# Altium PCB Audio module.PcbDoc
Units mil, origin at the board's own origin, x right, y up, seen from the top; angles counter-clockwise.
Board outline 1968.5 x 1968.5 mil, 2 copper layers (Top Layer, Bottom Layer); 34 components, 24 nets, 112 pads, 18 vias.
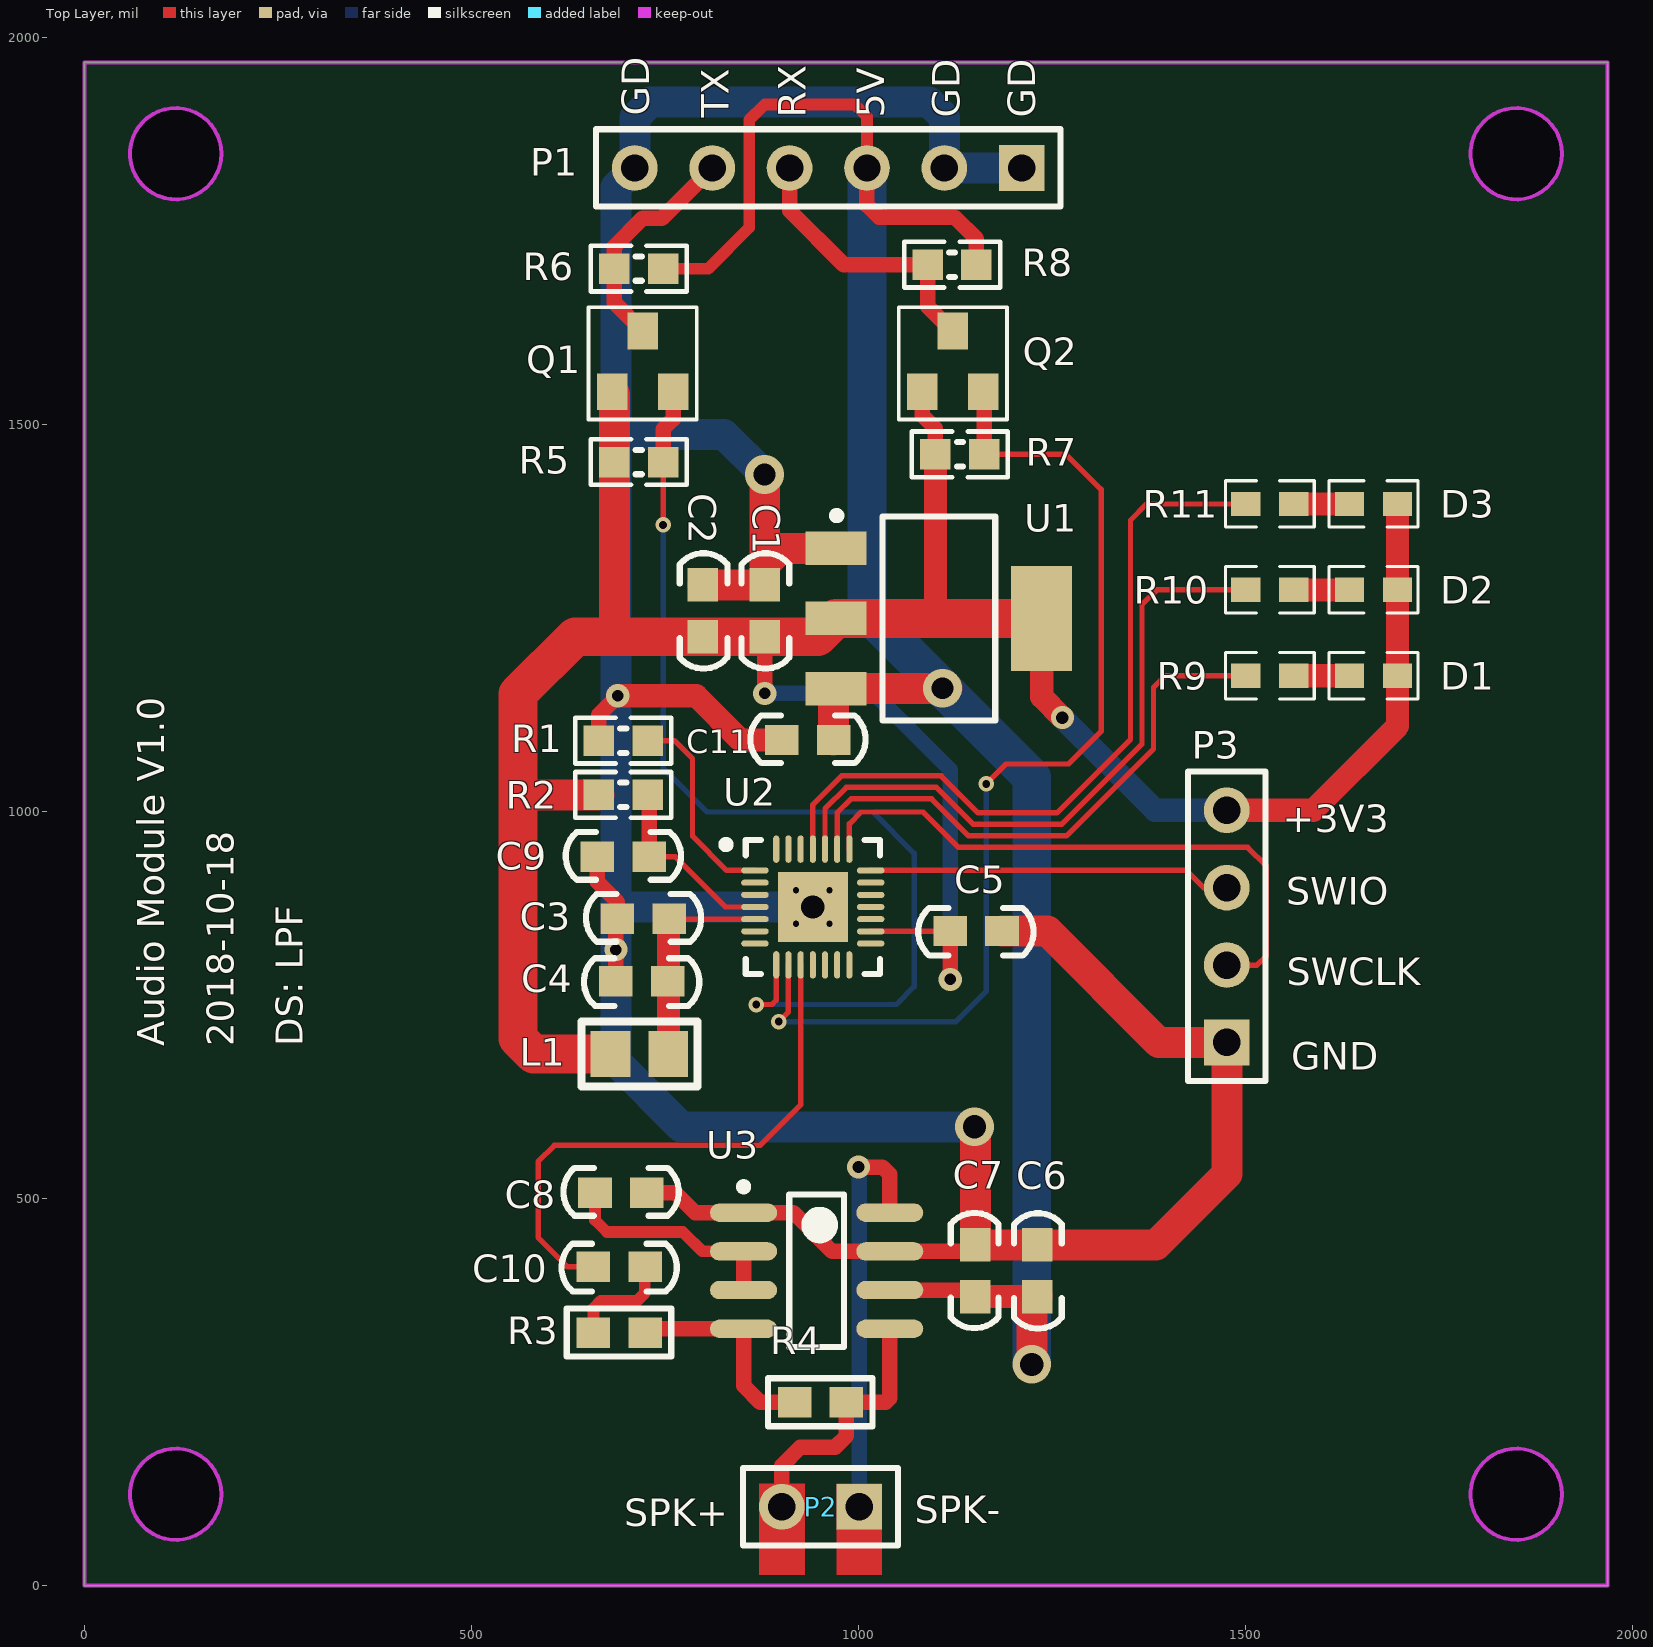
[diagram p0: Top Layer view]
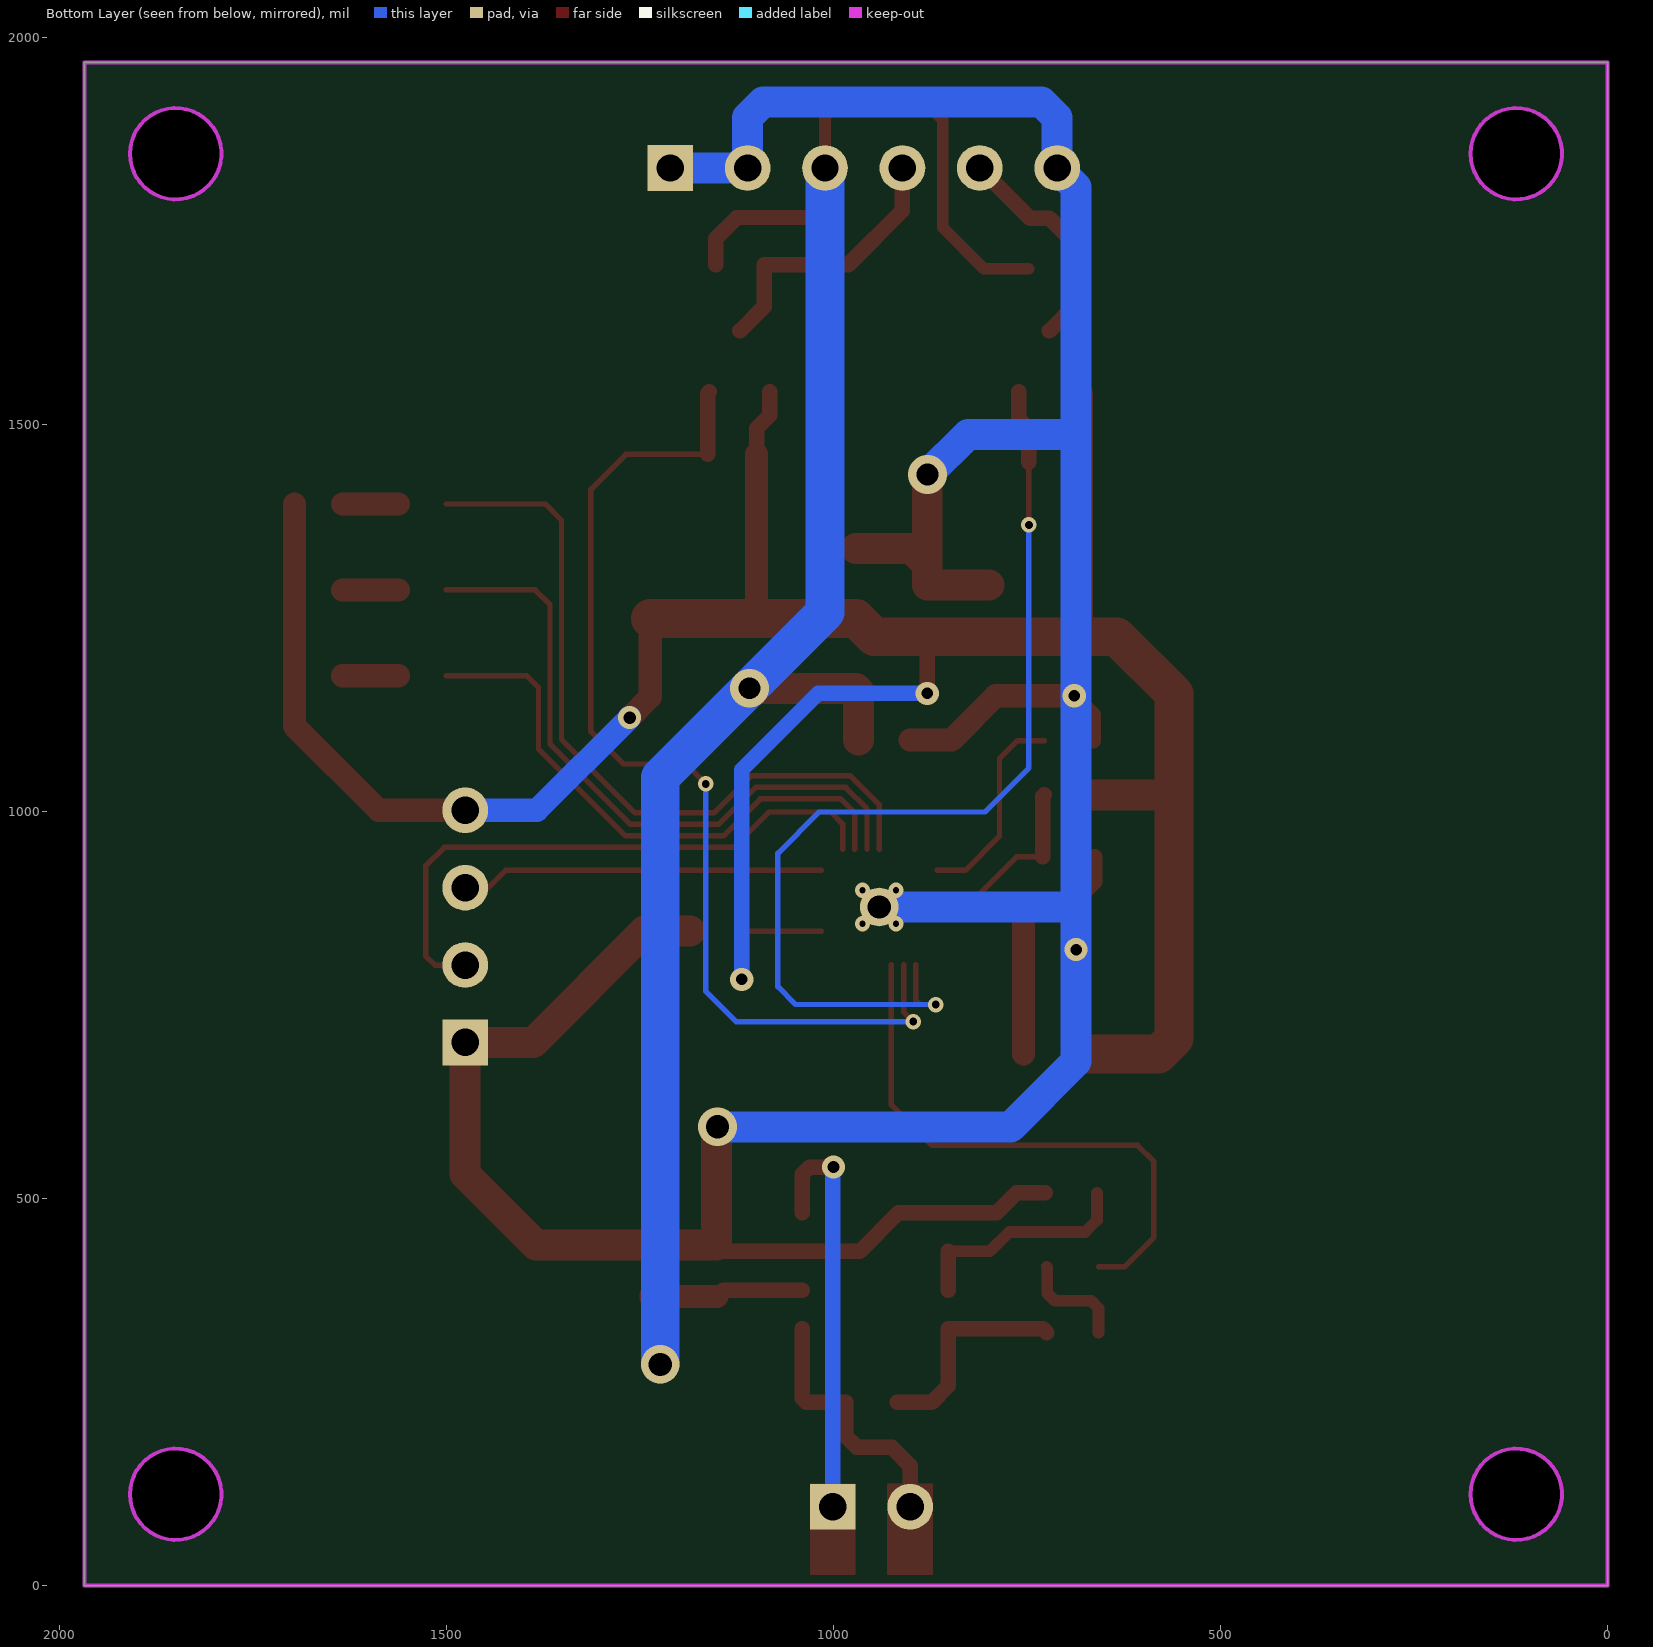
[diagram p1: Bottom Layer view, seen from below]

## Layer stack, top to bottom
Top Layer: signal copper 1.4
Dielectric: dielectric 12.6, FR-4, Dk 4.8
Bottom Layer: signal copper 1.4

## Board outline
0,0 1968.5,0 1968.5,1968.5 0,1968.5
cut-out: 118.11,1791.34 cw(c118.11,1850.39) 59.06,1850.39 cw(c118.11,1850.39) 118.11,1909.45 cw(c118.11,1850.39) 177.17,1850.39 cw(c118.11,1850.39)
cut-out: 1850.39,1791.34 cw(c1850.39,1850.39) 1791.34,1850.39 cw(c1850.39,1850.39) 1850.39,1909.45 cw(c1850.39,1850.39) 1909.45,1850.39 cw(c1850.39,1850.39)
cut-out: 1791.34,118.11 ccw(c1850.39,118.11) 1850.39,59.06 ccw(c1850.39,118.11) 1909.45,118.11 ccw(c1850.39,118.11) 1850.39,177.17 ccw(c1850.39,118.11)
cut-out: 118.11,59.06 cw(c118.11,118.11) 59.06,118.11 cw(c118.11,118.11) 118.11,177.17 cw(c118.11,118.11) 177.17,118.11 cw(c118.11,118.11)

## Design rules (kind name [scope] priority, off if disabled: settings)
Clearance [All] p1: gap=7.87
ComponentClearance [All] p1: gap=10 collisioncheckmode=3 verticalgap=5 showdistances=FALSE
PolygonConnect [All] p1: connectstyle=Relief reliefconductorwidth=10 reliefentries=4 polygonreliefangle="90 Angle"
RoutingVias [All] p1: holewidth=20 width=30 viastyle="Through Hole" minholewidth=5 minwidth=10 maxholewidth=100 maxwidth=200
SilkscreenOverComponentPads SilkToSolderMaskClearance [IsPad] p1: minsilkscreentomaskgap=10
SolderMaskExpansion [All] p1: expansion=4
Width [All] p1: maxlimit=100 minlimit=5 preferedwidth=20
26 further rules are at their usual default settings.

## Components (designator, comment, footprint, x,y, rotation, side; value= is the part's Value field where it differs from the comment)
C1 "Cap" 0603-2 879.24,1259.85 r270 top
C2 "Cap" 0603-2 799.24,1259.85 r270 top
C3 "Cap" 0603-2 722.37,861.98 r0 top
C4 "Cap" 0603-2 720.37,780.98 r180 top
C5 "Cap" 0603-2 1152.37,845.98 r180 top
C6 "Cap" 0603-2 1231.37,406.98 r270 top
C7 "Cap" 0603-2 1151.37,406.98 r90 top
C8 "Cap" 0603-2 693.37,507.98 r0 top
C9 "Cap" 0603-2 696.37,941.98 r0 top
C10 "Cap" 0603-2 691.37,411.98 r180 top
C11 "Cap" 0603-2 934.86,1092.78 r0 top
D1 "RED_LED" RES_0603 1665.86,1175.78 r180 top
D2 "YELLOW_LED" RES_0603 1665.86,1286.78 r180 top
D3 "BLUE_LED" RES_0603 1665.86,1397.78 r180 top
L1 "Inductor" 0805-1 717.37,686.98 r0 top
P1 "Header6" HDR6X1_A 1211.37,1831.98 r180 top
P2 "PZ-1*2" HDR2X1_A 1001.37,101.98 r180 top
P3 "PZ-1*4" HDR4X1_A 1476.37,701.98 r90 top
Q1 "AP2306" SOT-23 721.37,1581.98 r0 top
Q2 "AP2306" SOT-23 1122.37,1581.98 r0 top
R1 "10K" RES-0603 696.37,1091.98 r180 top
R2 "10K" RES-0603 696.37,1021.98 r180 top
R3 "Res1" 0603-1 691.37,326.98 r0 top
R4 "Res1" 0603-1 951.37,236.98 r0 top
R5 "10K" RES-0603 716.37,1451.98 r180 top
R6 "10K" RES-0603 716.37,1701.98 r0 top
R7 "10K" RES-0603 1131.37,1461.98 r180 top
R8 "10K" RES-0603 1121.37,1706.98 r0 top
R9 "RES" RES_0603 1531.86,1175.78 r0 top
R10 "RES" RES_0603 1531.86,1286.78 r0 top
R11 "RES" RES_0603 1531.86,1397.78 r0 top
U1 "AS1117-3.3" SOT-223 1104.24,1249.85 r270 top
U2 "GD32F150G4U6" QFN28-1 941.37,876.98 r0 top
U3 "E8002A" SOP-8 946.37,406.98 r0 top

## Footprints (in the part's own frame and the unit in brackets; to place one, negate y for a bottom-side part, rotate by r counter-clockwise, add the part's x,y. Pads: shape width x height; smd on the part's side, far side on the other; paste and mask are expansions set on the pad)
0603-1 [mm] "贴片带丝印"
  rect 1.1x1 smd: 1(-0.85,0) 2(0.85,0)
  silkscreen extent -1.73,-0.79 1.7,0.79, body extent -1.14,-0.38 1.14,0.38, height 1
0603-2 [mm] "贴片无丝印"
  rect 1.1x1 smd: 1(-0.85,0) 2(0.85,0)
  silkscreen extent -1.88,-0.76 1.9,0.81
0805-1 [mm] "贴片带丝印"
  rect 1.3x1.5 smd: 1(-0.95,0) 2(0.95,0)
  silkscreen extent -1.91,-1.07 1.91,1.07, body extent -1.14,-0.51 1.14,0.51, height 1
HDR2X1_A [mm] "Connector; Header; 2 Position"
  rect 1.5x1.5 hole 0.9: 1(0,0)
  round 1.5 hole 0.9: 2(2.54,0)
  silkscreen extent -1.27,-1.27 3.81,1.27
HDR4X1_A [mm] "Connector; Header; 4 Position"
  rect 1.5x1.5 hole 0.9: 1(0,0)
  round 1.5 hole 0.9: 2(2.54,0) 3(5.08,0) 4(7.62,0)
  silkscreen extent -1.27,-1.27 8.89,1.27
HDR6X1_A [mm] "Connector; Header; 4 Position"
  rect 1.5x1.5 hole 0.9: 1(0,0)
  round 1.5 hole 0.9: 2(2.54,0) 3(5.08,0) 4(7.62,0) 5(10.16,0) 6(12.7,0)
  silkscreen extent -1.27,-1.27 13.97,1.27
QFN28-1 [mm] "QFN, 28-Leads, Body 4.00x4.00mm, Pitch 0.40mm, Thermal Pad 2.30x2.30mm, IPC Medium Density"
  oval 0.9x0.2 smd: 1(-1.9,1.2) 2(-1.9,0.8) 3(-1.9,0.4) 4(-1.9,0) 5(-1.9,-0.4) 6(-1.9,-0.8) 7(-1.9,-1.2) 15(1.9,-1.2) 16(1.9,-0.8) 17(1.9,-0.4) 18(1.9,0) 19(1.9,0.4) 20(1.9,0.8) 21(1.9,1.2)
  oval 0.2x0.9 smd: 8(-1.2,-1.9) 9(-0.8,-1.9) 10(-0.4,-1.9) 11(0,-1.9) 12(0.4,-1.9) 13(0.8,-1.9) 14(1.2,-1.9) 22(1.2,1.9) 23(0.8,1.9) 24(0.4,1.9) 25(0,1.9) 26(-0.4,1.9) 27(-0.8,1.9) 28(-1.2,1.9)
  rect 2.3x2.3 smd: 29(0,0)
  silkscreen extent -2.97,-2.2 2.2,2.2, body extent -2.05,-2.05 2.05,2.05, height 0.8
RES-0603 [mm] "Chip Resistor, 2-Leads, Body 1.6x0.8mm, IPC Medium Density"
  rect 1x1 smd: 1(-0.8,0) 2(0.8,0)
  silkscreen extent -1.58,-0.75 1.57,0.75, body extent -0.88,-0.48 0.87,0.47, height 0.5
RES_0603 [mm]
  rect 0.96x0.8 smd: 1(-0.79,0) 2(0.79,0)
  silkscreen extent -1.46,-0.76 1.46,0.76, body extent -0.8,-0.41 0.8,0.39, height 0.38
SOP-8 [mm]
  oval 2.2x0.6 smd: 1(-2.4,1.905) 2(-2.4,0.635) 3(-2.4,-0.635) 4(-2.4,-1.905) 5(2.4,-1.905) 6(2.4,-0.635) 7(2.4,0.635) 8(2.4,1.905)
  silkscreen extent -2.52,-2.5 0.9,2.88, body extent -1.99,-2.5 1.99,2.5, height 1.75
SOT-23 [mm] "9014贴片封装"
  rect 1x1.2 smd: 1(-1,-1) 2(1,-1) 3(0,1)
  silkscreen extent -1.78,-1.91 1.78,1.78, body extent -1.5,-1.32 1.5,1.22, height 1.1
SOT-223 [mm]
  rect 1.1x2 smd: 1(-2.3,-3.375) 2(0,-3.375) 3(2.3,-3.375)
  rect 3.45x2 smd: 4(0,3.375)
  silkscreen extent -3.5,-3.48 3.35,1.85, body extent -3.3,-3.94 3.3,3.43, height 0.8

## Part data
C1 C2 C3 C4 C5 C6 C7 C8 C9 C10 C11: "无极性电容"
D1 D2 D3: library part LED
L1: "电感"
Q1 Q2: library part MOSFET-N1, "N-MOSFET1"
R1 R2 R5 R6 R7 R8: library part Res1, "贴片电阻"
R3 R4: "贴片电阻"
U1: library part AS1117, "AS1117"

## Free pads (board coordinates)
  round 50 hole 30: 0(941.37,876.98)

## Via types
v1: diameter 30, hole 15, Top Layer to Bottom Layer, 5 vias
v2: diameter 20, hole 10, Top Layer to Bottom Layer, 4 vias
v3: diameter 19.68, hole 7.87, Top Layer to Bottom Layer, 4 vias
v4: diameter 50, hole 28, Top Layer to Bottom Layer, 2 vias
v5: diameter 50, hole 30, Top Layer to Bottom Layer, 2 vias
v6: diameter 30, hole 16, Top Layer to Bottom Layer, 1 vias

## Nets (pads, with @x,y where several pads share a name; then routed paths per layer and width w, separated by ;. In a path a pad name is that pad's centre, name@x,y a point inside that pad or via, vN(x,y) a via of type N, cw(c..) or ccw(c..) an arc to the next point about the centre after c; other vN are vias at no path point)
+5V: C6.2 C7.1 C11.2 P1.3 R6.2 R8.2 U1.3 U3.6 | length 2876.7
  Top Layer w15: R6.2 806.37,1701.98 859.37,1754.98 859.37,1894.28 879.06,1913.98 995.37,1913.98 1011.37,1897.98 P1.3
  Top Layer w20: P1.3 1011.37,1783.98 1027.37,1767.98 1125.37,1767.98 1152.86,1740.48 R8.2 ; U3.6 1142.9,381.98 C7.1
  Top Layer w30: C7.1 C6.2
  Top Layer w40: C11.2 968.33,1156.26 U1.3 1114.38,1159.3 v4@1114.86,1159.78 ; v5(1224.37,285.98) 1224.37,366.51 C6.2
  Bottom Layer w50: P1.3 1011.37,1257.72 1224.37,1044.72 v5(1224.37,285.98)
  other v4: 1108.86,1159.78
A3V3: C3.2 C4.1 L1.2 U2.5 | length 285.9
  Top Layer w7: C3.2@754.77,860.91 755.08,861.23 U2.5
  Top Layer w30: L1.2 C3.2@754.77,860.91
BLUE_LED: R11.1 U2.25 | length 983.4
  Top Layer w7: U2.25 941.37,1009.35 978.54,1046.53 1107.18,1046.53 1155.11,998.6 1256.86,998.6 1351.86,1093.6 1351.86,1376.78 1372.86,1397.78 R11.1
D3V3: C1.2 C2.2 C5.2 D1.1 D2.1 D3.1 L1.1 P3.4 Q1.1 Q2.1 R2.2 R5.2 R7.2 U1.2 U1.4 U2.16 | length 3766.3
  Top Layer w7: U2.16 1118.41,845.48 C5.2
  Top Layer w20: Q1.1 Q1.1@684.87,1539.73 ; C1.2 879.24,1152.98 v1(879.37,1152.98) ; U1.2 U1.2@971.37,1257.72 ; Q2.1 1083,1512.35 1099.87,1495.47 R7.2 R7.2@1095.37,1457.47 ; v1(1118.9,783.44) C5.2
  Top Layer w30: 1099.87,1250.86 R7.2 ; U1.4 1237.11,1148.53 v6(1263.86,1121.78) ; P3.4 1588.06,1001.98 1696.96,1110.88 D1.1 D2.1 D3.1
  Top Layer w40: 563.37,1021.98 R2.2 ; 684.87,1226.39 R5.2 Q1.1@684.87,1539.73
  Top Layer w50: L1.1 580.66,686.98 560.37,707.28 560.37,1152.28 634.47,1226.39 C2.2 C1.2 947.9,1226.39 U1.2 U1.4
  Bottom Layer w20: v1(879.37,1152.98) 1020.37,1152.98 1031.61,1141.73 1118.9,1054.44 v1(1118.9,783.44)
  Bottom Layer w30: v6(1263.86,1121.78) 1383.66,1001.98 P3.4
DA: C10.2 U2.10 | length 735.8
  Top Layer w7: C10.2 624.37,411.98 586.37,449.98 586.37,547.98 607.37,568.98 873.37,568.98 925.62,621.23 U2.10
GND: C1.1 C2.1 C3.1 C4.2 C5.1 C6.1 C7.2 C8.2 C9.1 C11.1 P1.1 P1.2 P1.6 P3.1 pad.0 R1.2 U1.1 U2.29 U3.1 U3.7 | length 5080.5
  Top Layer w20: C9.1 662.9,909.44 688.9,883.44 C3.1 686.9,859.98 v1(686.9,821.98) C4.2 ; R1.2 664.87,1125.48 v1(689.37,1149.98) ; C8.2 763.37,507.98 789.37,481.98 U3.1 916.37,481.98 966.37,431.98 U3.7 1142.9,431.98 C7.2 ; C2.1@798.58,1293.98 C2.1 ; U1.1 U1.1@974.24,1343.28
  Top Layer w30: v1(689.37,1149.98) 790.66,1149.98 847.86,1092.78 C11.1
  Top Layer w40: C2.1 C1.1 879.24,1320.16 ; v4(878.86,1435.78) 879.24,1435.4 879.24,1320.16 ; U1.1 899.49,1340.4 879.24,1320.16 ; v5(1150.37,592.98) 1151.37,592.98 C7.2 C6.1 1384.83,440.44 1476.37,531.98 P3.1 1388.37,701.98 1244.37,845.98 C5.1
  Bottom Layer w40: v4(878.86,1435.78) 826.86,1487.78 686.9,1487.78 ; pad.0 691.9,876.98 686.9,881.98 ; v5(1150.37,592.98) 771.37,592.98 686.9,677.44 v1(686.9,821.98) 686.9,881.98 ; P1.1 P1.2 1111.37,1896.98 1091.37,1916.98 731.37,1916.98 711.37,1896.98 P1.6 686.9,1807.51 686.9,1487.78 ; 686.9,881.98 686.9,1487.78
  other v3: 919.71,855.32 963.02,855.32 919.71,898.63 963.02,898.63
NetC8_1: C8.1 U3.2 U3.3 | length 294.3
  Top Layer w15: C8.1 659.9,472.44 675.37,456.98 773.37,456.98 798.37,431.98 U3.2
  Top Layer w20: U3.3 U3.2
NetC10_1: C10.1 R3.1 | length 140.3
  Top Layer w15: R3.1 657.9,358.51 667.37,367.98 714.37,367.98 724.37,377.98 724.37,411.51 C10.1
NetD1_2: D1.2 R9.2 | length 71.8
  Top Layer w30: R9.2 D1.2
NetD2_2: D2.2 R10.2 | length 71.8
  Top Layer w30: R10.2 D2.2
NetD3_2: D3.2 R11.2 | length 71.8
  Top Layer w30: R11.2 D3.2
NetP2_1: P2.1 U3.8 | length 533.3
  Top Layer w20: v1(1000.37,540.98) 1031.37,540.98 1040.85,531.49 U3.8
  Bottom Layer w20: v1(1000.37,540.98) 1001.37,539.98 P2.1
NetP2_2: P2.2 R4.2 U3.5 | length 343.7
  Top Layer w20: P2.2 901.37,154.98 925.37,178.98 970.37,178.98 984.83,193.44 R4.2 1035.37,236.98 1040.85,242.47 U3.5
NetR1_1: R1.1 U2.1 | length 266.9
  Top Layer w7: R1.1 762.66,1091.98 785.86,1068.78 785.86,968.48 830.12,924.22 U2.1
NetR3_2: R3.2 R4.1 U3.4 | length 277.6
  Top Layer w20: R3.2 729.83,331.98 U3.4 851.88,258.47 873.37,236.98 R4.1
NRST: C9.2 R2.1 U2.4 | length 244.5
  Top Layer w7: C9.2 763.37,941.98 828.37,876.98 U2.4
  Top Layer w20: R2.1 729.83,1020.01 C9.2
RED_LED: R9.1 U2.23 | length 734.5
  Top Layer w7: U2.23 972.86,998.78 990.86,1016.78 1094.86,1016.78 1142.79,968.85 1269.18,968.85 1381.61,1081.28 1381.61,1160.78 1396.61,1175.78 R9.1
RX: P1.4 Q2.3 R8.1 | length 361.2
  Top Layer w20: P1.4 911.37,1776.98 981.37,1706.98 R8.1 1089.87,1652.84 Q2.3@1121.37,1621.35
RXD: Q2.2 R7.1 U2.9 | length 1374.9
  Top Layer w7: v2(897.37,728.98) 909.87,741.48 U2.9 ; v2(1165.37,1035.98) 1191.17,1061.78 1271.86,1061.78 1313.86,1103.78 1313.86,1416.78 1268.66,1461.98 R7.1 R7.1@1165.37,1459.47
  Top Layer w20: Q2.2@1160.74,1542.61 1162.86,1540.48 R7.1
  Bottom Layer w7: v2(897.37,728.98) 1126.37,728.98 1165.37,767.98 v2(1165.37,1035.98)
SWCLK: P3.2 U2.22 | length 778.7
  Top Layer w7: U2.22 988.61,984.53 1003.86,999.78 1083.86,999.78 1129.66,953.98 1503.37,953.98 1527.37,929.98 1527.37,813.98 1515.37,801.98 P3.2
SWIO: P3.3 U2.21 | length 469.4
  Top Layer w7: U2.21 1424.12,924.22 1446.37,901.98 P3.3
TX: P1.5 Q1.3 R6.1 | length 292.8
  Top Layer w20: Q1.3 684.87,1657.84 R6.1 684.87,1730.48 721.37,1766.98 746.37,1766.98 P1.5
TXD: Q1.2 R5.1 U2.8 | length 1320.8
  Top Layer w7: v2(747.86,1370.78) 747.86,1397.48 R5.1 ; v2(868.37,750.98) 888.37,750.98 894.12,756.73 U2.8
  Top Layer w20: R5.1 747.86,1494.47 760.74,1507.35 Q1.2
  Bottom Layer w7: v2(747.86,1370.78) 747.86,1056.78 804.86,999.78 1018.86,999.78 1072.37,946.28 1072.37,773.98 1049.37,750.98 v2(868.37,750.98)
YELLOW_LED: R10.1 U2.24 | length 858.3
  Top Layer w7: U2.24 957.11,1004.07 984.7,1031.65 1101.02,1031.65 1148.95,983.72 1263.02,983.72 1366.74,1087.44 1366.74,1267.65 1385.86,1286.78 R10.1
pads on no net: U2.2 U2.3 U2.6 U2.7 U2.11 U2.12 U2.13 U2.14 U2.15 U2.17 U2.18 U2.19 U2.20 U2.26 U2.27 U2.28

## Keep-outs
Keep-Out Layer:
  circle w5: c1850.39,118.11 r59.06
  circle w5: c1850.39,1850.39 r59.06
  circle w5: c118.11,1850.39 r59.06
  circle w5: c118.11,118.11 r59.06
  lines w5: 0,0 1968.5,0 1968.5,1968.5 0,1968.5 0,0

## Other copper
Top Layer:
  rectangle net NetP2_2: 872,13.78 931,131.78
  rectangle net NetP2_1: 972,13.78 1031,131.78

## Silkscreen, mask and mechanical layers (free items; w line width, h text height)
Top Overlay:
  text "GD" at 730,1899.78 h36 r90
  text "TX" at 833,1896.78 h36 r90
  text "RX" at 932,1896.78 h36 r90
  text "5V" at 1034,1896.78 h36 r90
  text "GD" at 1131,1896.78 h36 r90
  text "GD" at 1229,1896.78 h36 r90
  text "+3V3" at 1548.86,973.78 h36
  text "SWIO" at 1552.86,879.78 h36
  text "SWCLK" at 1553.86,775.78 h36
  text "Audio Module V1.0" at 115,697 h60 r90
  text "2018-10-18" at 204.5,697 h60 r90
  text "DS: LPF" at 294,697 h60 r90
  text "GND" at 1559.86,666.78 h36
  text "SPK-" at 1073,80.78 h36
  text "SPK+" at 698,76.78 h36
Top Solder:
  rectangle: 972,13.78 1031,130.78
  rectangle: 872,13.78 931,131.78